# Altium PCB RELAY_1.PcbDoc
Units mm, origin at the board's own origin, x right, y up, seen from the top; angles counter-clockwise.
Board outline 55.65 x 32.79 mm, 2 copper layers (Top Layer, Bottom Layer); 18 components, 21 nets, 53 pads, 3 vias.
Unrouted connection lines stored in the file: 1.
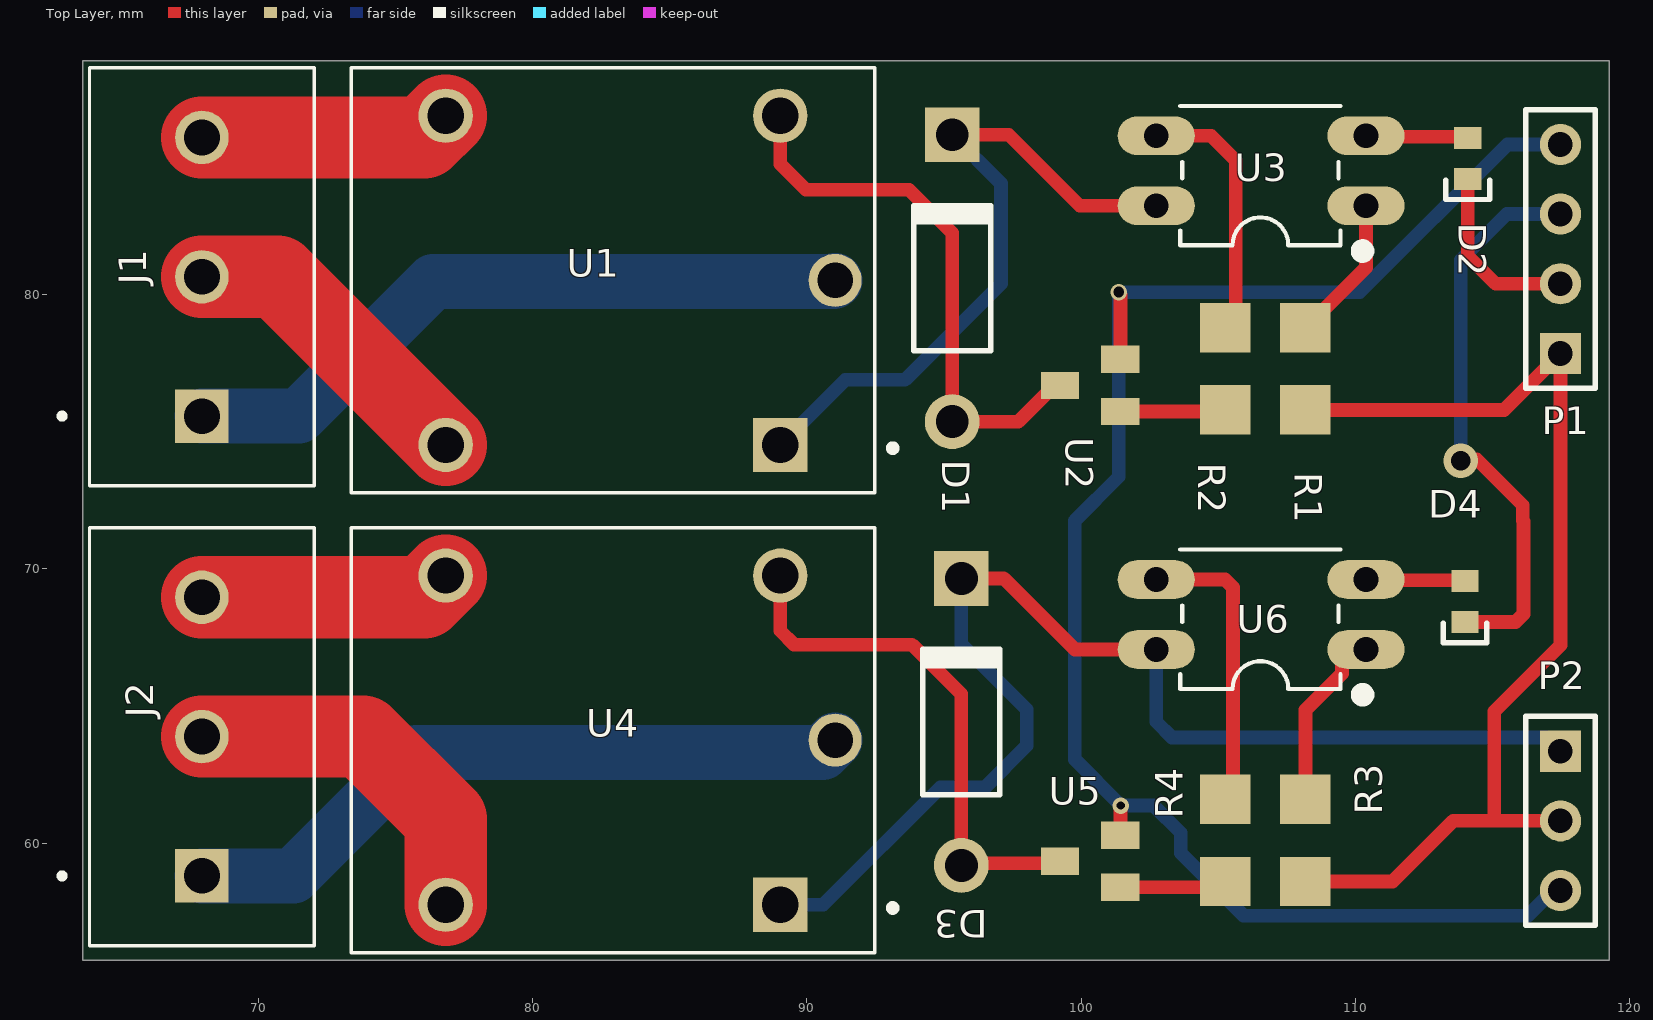
[diagram p0: Top Layer view]
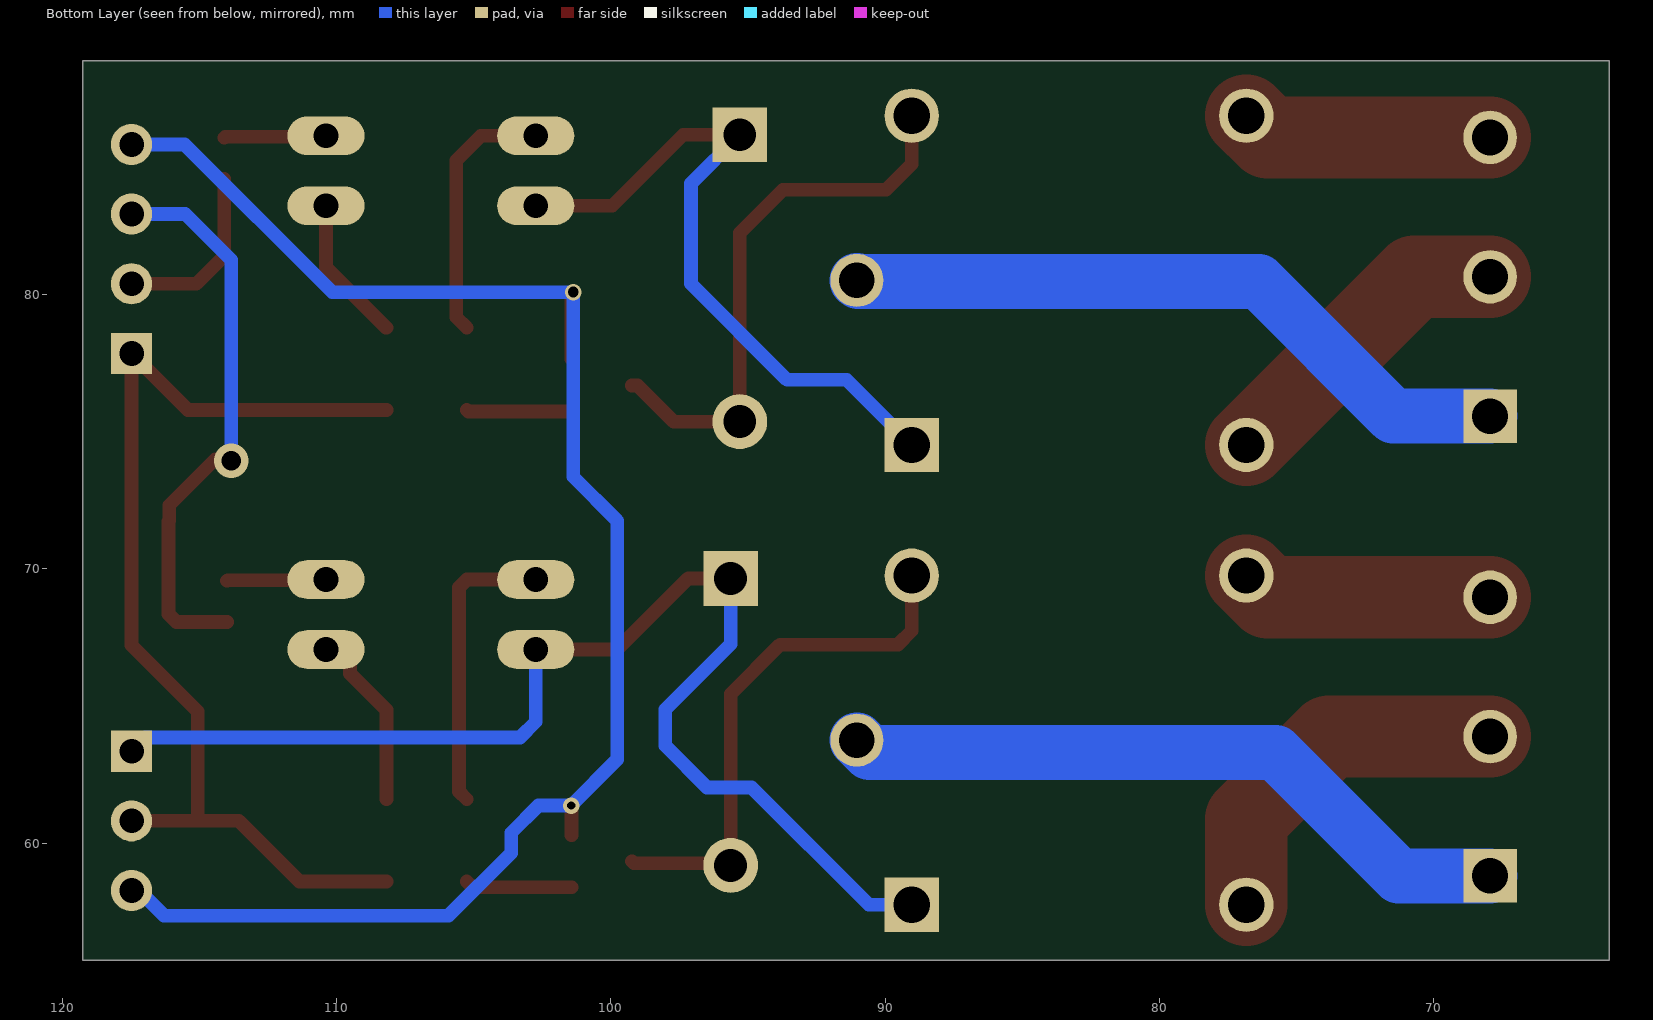
[diagram p1: Bottom Layer view, seen from below]
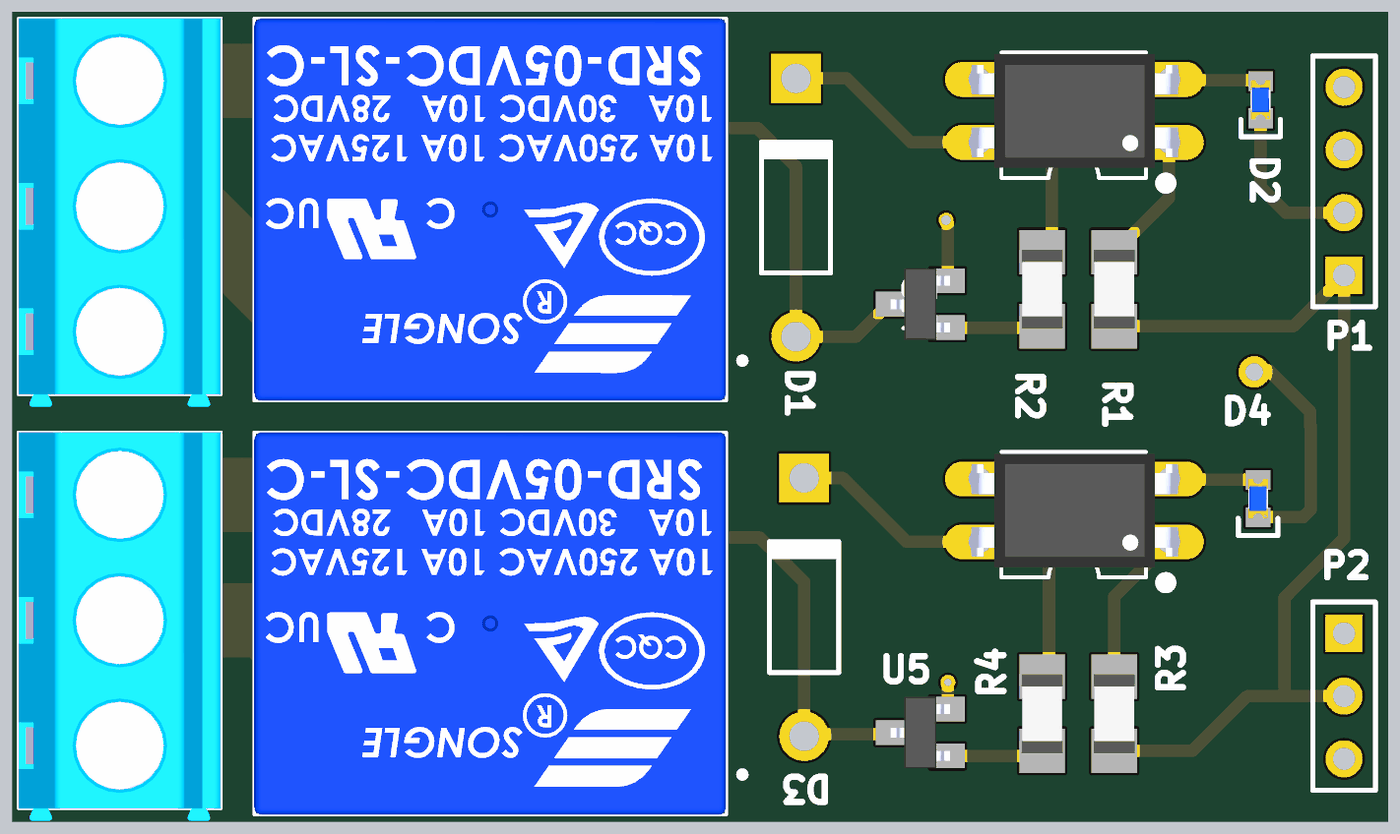
[diagram p2: 3D render of the assembled board from above, using the file's embedded part models]

## Layer stack, top to bottom
Top Solder: solder mask 0.0102, Solder Resist, Dk 3.5
Top Layer: signal copper 0.0356
Dielectric 1: dielectric 0.32, FR-4, Dk 4.8
Bottom Layer: signal copper 0.0356
Bottom Solder: solder mask 0.0102, Solder Resist, Dk 3.5

## Board outline
63.602,55.728 63.602,88.519 119.253,88.519 119.253,55.728

## Design rules (kind name [scope] priority, off if disabled: settings)
Clearance [All] p1: gap=0 ignorepadtopadclearanceinfootprint=FALSE
PolygonConnect [All] p1: connectstyle=Relief reliefconductorwidth=0.254 reliefentries=4 polygonreliefangle="90 Angle" airgapwidth=0.254
RoutingVias [All] p1: holewidth=0.3 width=0 viastyle="Through Hole" minholewidth=0.2 minwidth=0 maxholewidth=1 maxwidth=1.27
SolderMaskExpansion [All] p1: expansion=0.102 istentingtop=FALSE
UnRoutedNet [All] p1: checkbadconnections=TRUE
Width [All] p1: maxlimit=3 minlimit=0.254 preferedwidth=0.254 minimp=50.000000 maximp=50.000000 favimp=50.000000
29 further rules are at their usual default settings.

## Components (designator, comment, footprint, x,y, rotation, side; value= is the part's Value field where it differs from the comment)
D1 "Diode 1N4003" DO-41 95.301,80.594 r90 top
D2 "BLUE" LED_0603_BLUE 114.097,84.963 r90 top
D3 "Diode 1N4003" DO-41 95.631,64.414 r90 top
D4 "BLUE" LED_0603_BLUE 113.995,68.809 r90 top
J1 "Terminal Block Connector" TB006-508-03BE 67.945,80.645 r90 top
J2 "Terminal Block Connector" TB006-508-03BE 67.945,63.881 r90 top
P1 "Header 4" HDR1X4 117.475,77.851 r90 top
P2 "Header 3" HDR1X3 117.475,63.348 r270 top
R1 "1k" RES_1206 108.179,77.291 r270 top
R2 "510R" RES_1206 105.258,77.291 r90 top
R3 "1k" RES_1206 108.179,60.096 r270 top
R4 "510R" RES_1206 105.258,60.096 r90 top
U1 "SRD-05VDC-SL-C" RELAY_SRD-03VDC-SL-C 82.931,80.515 r180 top
U2 "BCW31 NPN" SOT23 100.33,76.683 r90 top
U3 "LTV-817" DIP-4 106.451,84.379 r90 top
U4 "SRD-05VDC-SL-C" RELAY_SRD-03VDC-SL-C 82.931,63.751 r180 top
U5 "BCW31 NPN" SOT23 100.33,59.334 r90 top
U6 "LTV-817" DIP-4 106.451,68.199 r90 top

## Footprints (in the part's own frame and the unit in brackets; to place one, negate y for a bottom-side part, rotate by r counter-clockwise, add the part's x,y. Pads: shape width x height; smd on the part's side, far side on the other; paste and mask are expansions set on the pad)
DIP-4 [mm]
  oval 1.408x2.816 hole 0.9: 1(-1.143,-3.937) 2(1.407,-3.937) 3(1.407,3.713) 4(-1.143,3.713)
  silkscreen extent -2.97,-3.99 2.5,2.83, body extent -2.17,-4.66 2.43,4.4, height 5
DO-41 [mm] "Diode, Axial; Body 5.2 x 2.7 mm (LxDia. max), Lead Dia. 0.86 mm (max)"
  round 2 hole 1.2: 1(-5.23,0)
  rect 2x2 hole 1.2: 2(5.23,0)
  silkscreen extent -2.65,-1.4 2.75,1.4
HDR1X3 [mm] "Connector; Header; 3 Position"
  rect 1.5x1.5 hole 0.9: 1(0,0)
  round 1.5 hole 0.9: 2(2.54,0) 3(5.08,0)
  silkscreen extent -1.27,-1.27 6.35,1.27
HDR1X4 [mm] "Connector; Header; 4 Position"
  rect 1.5x1.5 hole 0.9: 1(0,0)
  round 1.5 hole 0.9: 2(2.54,0) 3(5.08,0) 4(7.62,0)
  silkscreen extent -1.27,-1.27 8.89,1.27
LED_0603_BLUE [mm]
  rect 0.8x1 smd: A(0.75,0) K(-0.75,0)
  silkscreen extent -1.5,-0.8 -0.8,0.8, body extent -0.8,-0.4 0.8,0.4, height 0.6
RELAY_SRD-03VDC-SL-C [mm]
  rect 1.98x1.98 / inner round 1.98 / far side rect 1.98x1.98 hole 1.32: A1(-6.1,6)
  round 1.98 hole 1.32: A2(-6.1,-6) NC(6.1,6) NO(6.1,-6)
  round 1.935 hole 1.29: COM(-8.1,0)
  silkscreen extent -10.3,-7.75 9.55,7.75, body extent -9.55,-7.75 9.55,7.75, height 15.4
RES_1206 [mm]
  rect 1.8x1.84 smd: 1(-1.5,0) 2(1.5,0)
  body extent -1.6,-0.83 1.6,0.83, height 0.57
SOT23 [mm]
  rect 1x1.4 smd: B(-0.95,-1.1) C(0,1.1) E(0.95,-1.1)
  body extent -1.45,-1.2 1.45,1.2, height 1.14
TB006-508-03BE [mm] "Terminal-screw-connector"
  rect 1.95x1.95 / inner round 1.95 / far side rect 1.95x1.95 hole 1.3: 1(-5.08,0)
  round 1.95 hole 1.3: 2(0,0) 3(5.08,0)
  silkscreen extent -7.62,-4.1 7.62,5.2, body extent -8.12,-4.1 7.62,4.1, height 10

## Part data
D1 D3: "1 Amp General Purpose Rectifier", Code_JEDEC=DO-204-AL, ComponentLink1Description="Manufacturer Link", ComponentLink1URL=http://www.fairchildsemi.com/, ComponentLink2Description=Datasheet, ComponentLink2URL=http://www.fairchildsemi.com/ds/1N%2F1N4001.pdf, DatasheetVersion=1998, LatestRevisionDate=17-Jul-2002, LatestRevisionNote="Re-released for DXP Platform.", PackageDescription="Diode, Axial; Body 5.2 x 2.7 mm (LxDia. max), Lead Dia. 0.86 mm (max)", PackageReference=DO-41, PackageVersion=Aug-1999, Published=8-Jun-2000, Publisher="Altium Limited"
D2 D4: library part LED_0603_BLUE, "LED 0603 BLUE SMD"
J1 J2: library part TB006-508-03BE, "2~24 Poles, Screw Type, Horizontal, 5.08 Pitch, 26~14 (AWG), Terminal Block Connector"
P1: "Header, 4-Pin", LatestRevisionDate=17-Jul-2002, LatestRevisionNote="Re-released for DXP Platform.", Publisher="Altium Limited"
P2: "Header, 3-Pin", LatestRevisionDate=17-Jul-2002, LatestRevisionNote="Re-released for DXP Platform.", Publisher="Altium Limited"
R1 R2 R3 R4: library part RES_1206, "Resistor SMD 1206"
U1 U4: library part Relay-Songle
U2 U5: "Bipolar (BJT) Transistor NPN General Purpose Amplifier Surface Mount"
U3 U6: "Optocouplor"

## Via types
v1: diameter 0.6, hole 0.3, Top Layer to Bottom Layer, 1 vias
v2: diameter 0.6, hole 0.4, Top Layer to Bottom Layer, 1 vias
v3: diameter 1.27, hole 0.711, Top Layer to Bottom Layer, 1 vias

## Nets (pads, with @x,y where several pads share a name; then routed paths per layer and width w, separated by ;. In a path a pad name is that pad's centre, name@x,y a point inside that pad or via, vN(x,y) a via of type N, cw(c..) or ccw(c..) an arc to the next point about the centre after c; other vN are vias at no path point)
GND: P1.4 P2.3 U2.E U5.E | length 60.5
  Top Layer w0.5: v2(101.371,80.086) 101.371,80.059 101.439,79.992 101.439,77.641 U2.E ; U5.E 101.439,60.293 101.439,61.358 v1(101.448,61.366)
  Bottom Layer w0.5: P2.3 117.204,58.268 116.29,57.353 105.918,57.353 103.632,59.639 103.632,60.376 102.641,61.366 v1(101.448,61.366) 99.771,63.043 99.771,71.755 101.371,73.355 v2(101.371,80.086) 110.16,80.086 115.545,85.471 P1.4
IN1: D2.K P1.2 | length 6.6
  Top Layer w0.5: D2.K 114.097,81.407 115.113,80.391 P1.2
IN2: D4.K P1.3 | length 20.9
  Top Layer w0.5: v3@113.894,73.965 113.868,73.939 v3(113.843,73.939) 113.894,73.99 114.427,73.99 116.103,72.314 116.103,71.755 116.129,71.73 116.129,68.351 115.836,68.059 D4.K
  Bottom Layer w0.5: v3(113.843,73.939) 113.843,81.255 115.519,82.931 P1.3
NetD1_1: D1.1 U1.A2 U2.C | length 20.4
  Top Layer w0.5: U1.A2 89.031,84.756 89.967,83.82 93.726,83.82 95.301,82.245 D1.1 97.712,75.364 99.03,76.683 U2.C
NetD2_A: D2.A U3.2 | length 3.7
  Top Layer w0.5: U3.2 110.425,85.749 114.06,85.749 D2.A
NetD3_1: D3.1 U4.A2 U5.C | length 19.5
  Top Layer w0.5: U4.A2 89.031,67.738 89.535,67.234 93.828,67.234 95.631,65.43 D3.1 95.706,59.259 99.155,59.259 U5.C
NetD4_A: D4.A U6.2 | length 3.6
  Top Layer w0.5: U6.2 110.412,69.582 113.971,69.582 D4.A
NetJ1_1: J1.1 U1.COM | length 25.1
  Bottom Layer w2: J1.1 71.476,75.565 76.378,80.467 90.983,80.467 U1.COM
NetJ1_2: J1.2 U1.NC | length 11.4
  Top Layer w3: J1.2 70.701,80.645 U1.NC
NetJ1_3: J1.3 U1.NO | length 9.2
  Top Layer w3: J1.3 76.041,85.725 U1.NO
NetJ2_1: J2.1 U4.COM | length 25.1
  Bottom Layer w2: J2.1 71.272,58.801 75.768,63.297 90.577,63.297 U4.COM
NetJ2_2: J2.2 U4.NC | length 13.2
  Top Layer w3: J2.2 73.812,63.881 76.831,60.862 U4.NC
NetJ2_3: J2.3 U4.NO | length 9.2
  Top Layer w3: J2.3 76.041,68.961 U4.NO
NetR1_1: R1.1 U3.1 | length 5.4
  Top Layer w0.5: R1.1 108.199,78.791 110.388,80.981 U3.1
NetR2_1: R2.1 U2.B | length 3.9
  Top Layer w0.5: U2.B 105.199,75.733 R2.1
NetR2_2: R2.2 U3.3 | length 9.5
  Top Layer w0.5: U3.3 104.74,85.786 105.639,84.887 105.639,79.172 R2.2
NetR3_1: R3.1 U6.1 | length 6.6
  Top Layer w0.5: R3.1 108.179,64.846 109.511,66.178 109.511,66.637 109.93,67.056 U6.1
NetR4_1: R4.1 U5.B | length 3.9
  Top Layer w0.5: U5.B 105.046,58.384 R4.1
NetR4_2: R4.2 U6.3 | length 10.8
  Top Layer w0.5: U6.3 105.244,69.606 105.537,69.313 105.537,61.876 R4.2
RY_VCC: D1.2 D3.2 P2.1 U1.A1 U3.4 U4.A1 U6.4 | length 69.6
  Top Layer w0.5: D1.2 97.361,85.824 99.949,83.236 U3.4 ; D3.2 97.183,69.644 99.771,67.056 U6.4
  Bottom Layer w0.5: U4.A1 90.593,57.751 94.869,62.027 96.495,62.027 98.019,63.551 98.019,64.872 95.631,67.259 D3.2 ; U1.A1 91.402,76.886 93.574,76.886 97.079,80.391 97.079,84.046 D1.2 ; U6.4 102.738,64.419 103.31,63.848 116.975,63.848 P2.1
VCC: P1.1 P2.2 R1.2 R3.2 | length 38.4
  Top Layer w0.5: R3.2 111.352,58.596 113.563,60.808 115.113,60.808 ; R1.2 115.415,75.791 P1.1 117.475,67.208 115.062,64.795 115.062,60.858 115.113,60.808 ; P2.2 115.113,60.808

## Silkscreen, mask and mechanical layers (free items; w line width, h text height)
Drill Guide:
  the board outline again, w0.127

## Text inside footprints (layer, text, board x,y; h text height)
D2: Mechanical 13 "+" at 113.488,86.28 h0.5 r90
D4: Mechanical 13 "+" at 113.387,70.125 h0.5 r90